# EAGLE board LF_HF_ant (EAGLE 6.5.0)
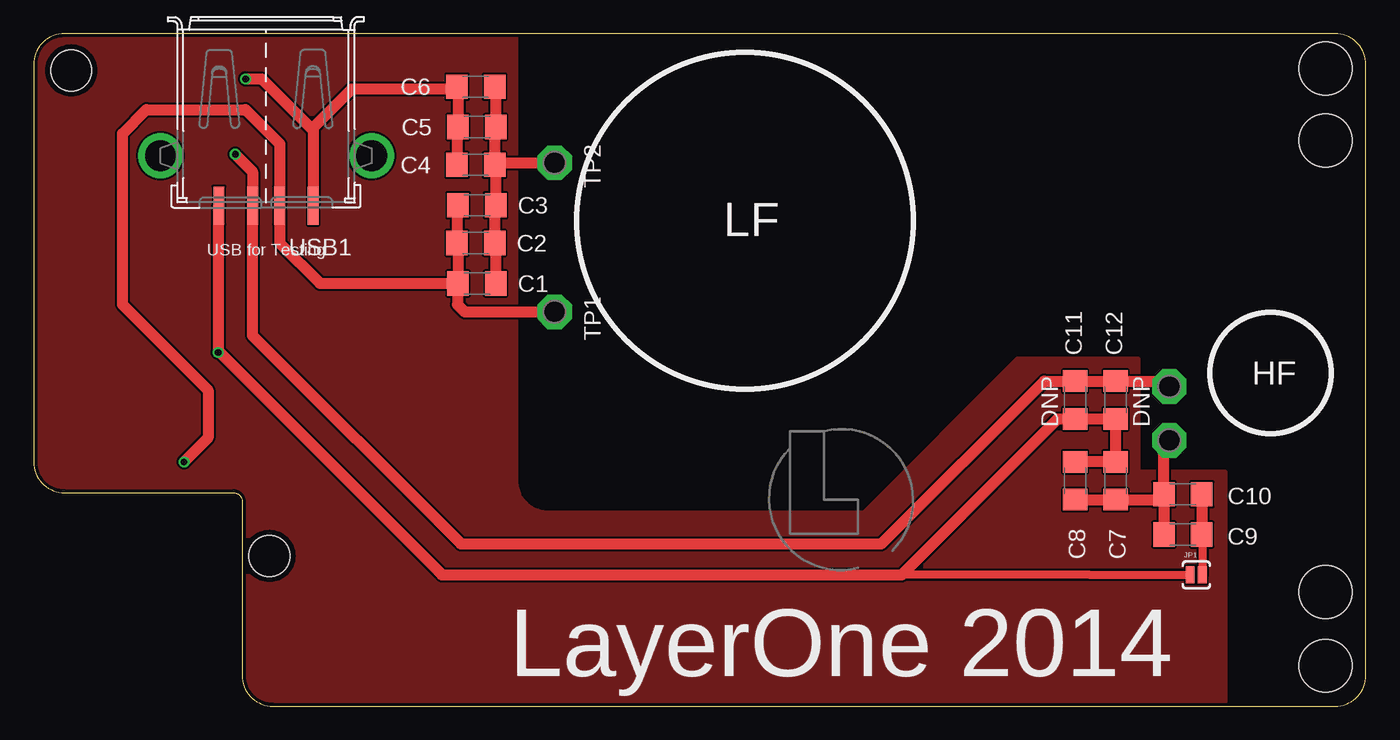
[diagram p0: board, top side]
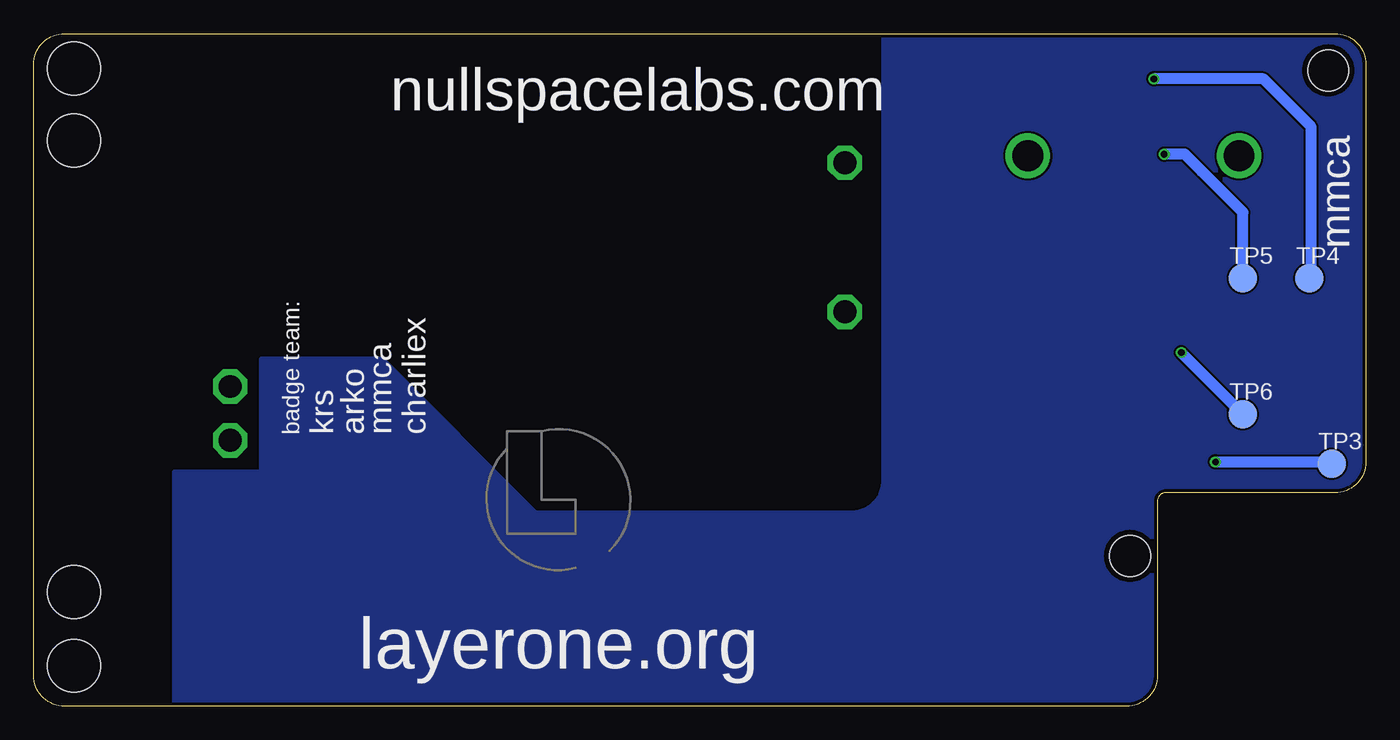
[diagram p1: board, bottom side, seen from below]

Size 99 x 49.96 mm. Coordinates in mm from the lower left corner, seen from the top.
Outline: 2.29,15.86 14.86,15.86 arc-90 15.49,15.22 15.49,2.29 arc90 17.78,0 96.71,0 arc90 99,2.29 99,47.67 arc90 96.71,49.96 2.29,49.96 arc90 0,47.67 0,18.15 arc90 2.29,15.86
Copper layers (1*16): Top 0.035mm / dielectric 1.5mm / Bottom 0.035mm
Design rules "ITEADstudio_DRC": minimum track width 6mil, minimum drill 12mil, track to track 6mil, track to pad 6mil, pad to pad 6mil, via to via 6mil, smd to smd 0mil, copper to edge 10mil, drill to drill 10mil, minimum pad ring 10mil, minimum via ring 6mil, stop-mask expansion 2mil, vias tented up to drill 100mil, thermal gap 10mil
Holes 3.94 mm at 96,47.37 96,3 96,42.02 96,8.49

## Footprints (pad centres in the part's own frame; a part is rotated, then mirrored left to right if it is on the bottom)
1206 = smd 1.6 x 1.8: 1 -1.4,0; 2 1.4,0
C1206 = smd 1.6 x 1.8: 1 -1.4,0; 2 1.4,0
SJ_2S-NO = smd 0.635 x 1.27: 1 -0.45,0; 2 0.45,0
P1-17 = drill 1.702 pad 2.54 octagon: TP 0,0
TP_MILLMAX_R = smd 2.108 x 2.108: TP 0,0
STAND-OFF-TIGHT = hole 3.048: 0,0
CONN_USB_A_F = smd 0.8 x 2.82: 1 -3.5,6.46; 2 -1,6.46; 3 1,6.46; 4 3.5,6.46 | drill 2.3: B1 -7.85,2.75; B2 7.85,2.75

## Placement (x,y rotation side)
C1  [1206]  32.94,31.4 0 top
C2  [1206]  32.86,34.4 0 top
C3  [1206]  32.94,37.21 0 top
C4  [1206]  32.86,40.21 0 top
C5  [1206]  32.94,43.02 0 top
C6  [1206]  32.86,46.02 0 top
C7  [C1206]  80.4,16.75 270 top
C8  [C1206]  77.4,16.75 270 top
C9  [C1206]  85.4,12.75 180 top
C10  [C1206]  85.4,15.75 180 top
C11  DNP  [C1206]  77.4,22.75 270 top
C12  DNP  [C1206]  80.4,22.75 270 top
JP1  [SJ_2S-NO]  86.4,9.75 0 top
TP1  PTR1PAD1-17  [P1-17]  38.72,29.29 270 top
TP2  PTR1PAD1-17  [P1-17]  38.72,40.37 270 top
TP3  TP  [TP_MILLMAX_R]  2.54,18.02 0 bottom
TP4  TP  [TP_MILLMAX_R]  4.19,31.8 0 bottom
TP5  TP  [TP_MILLMAX_R]  9.14,31.8 0 bottom
TP6  TP  [TP_MILLMAX_R]  9.14,21.7 0 bottom
TP7  PTR1PAD1-17  [P1-17]  84.4,23.75 0 top
TP8  PTR1PAD1-17  [P1-17]  84.4,19.75 0 top
U$1  [STM32-PROX_L1LOGO]  60,15.35 0 top
U$2  [STM32-PROX_L1LOGO]  60,15.35 0 bottom
U$3  [STAND-OFF-TIGHT]  2.79,47.23 0 top
U$4  [STAND-OFF-TIGHT]  17.53,11.16 0 top
USB1  CON-USB-F-2PB  [CONN_USB_A_F]  17.27,43.64 180 top

## Library data of the parts
C1-C6 JP1 = SparkFun-Passives
C7-C12 = rcl
TP1-TP8 = testpad
U$1 U$2 = lf-antenna-usb
U$3 U$4 = STM32-PROX
USB1 = dp_devices

## Nets
HF1: C11.1 C12.1 TP5.TP TP7.TP USB1.3
HF2: C7.2 C8.2 C9.2 C10.2 TP8.TP
LO1: C1.1 C2.1 C3.1 TP1.TP TP3.TP USB1.2
LO2: C4.1 C5.1 C6.1 TP4.TP USB1.1
N$3: C1.2 C2.2 C3.2 C4.2 C5.2 C6.2 TP2.TP
N$4: C7.1 C8.1 C11.2 C12.2 JP1.1 TP6.TP USB1.4
N$5: C9.1 C10.1 JP1.2

## Tracks (layer width: path | path; a pad name or v marks a point on that pad's centre or on a via)
GND
  pour Top: 15.75,15.86 2.56,15.75 arc-90 0.25,18.04 0.25,47.36 arc-90 2.54,49.64 35.81,49.64 35.81,16.61 arc90 38.34,14.34 61.72,14.34 73.15,25.77 82.04,25.77 82.04,17.38 88.52,17.38 88.52,0.37 17.92,0.37 arc-90 15.64,1.9
  pour Bottom: 15.75,15.86 2.56,15.75 arc-90 0.25,18.04 0.25,47.36 arc-90 2.54,49.64 35.81,49.64 35.81,16.61 arc90 38.34,14.34 61.72,14.34 73.15,25.77 82.04,25.77 82.04,17.38 88.52,17.38 88.52,0.37 17.92,0.37 arc-90 15.64,1.9
HF1  (via drill 0.5)
  Top 0.813: C11.1 C12.1 84,24.15 TP7.TP | 77.31,24.24 C11.1 | v14.99,41.01 16.27,39.72 USB1.3 16.26,37.17 16.26,27.54 31.75,12.05 62.99,12.05 75.09,24.15 C11.1
  Bottom 0.813: TP5.TP 9.14,36.69 12.19,39.74 13.46,41.01 v14.99,41.01
HF2
  Top 0.406: 83.6,15.35 C10.2
  Top 0.813: C8.2 C7.2 83.6,15.35 C10.2 | C10.2 C9.2 | C10.2 84,19.35 TP8.TP
LO1  (via drill 0.5)
  Top 0.813: C1.1 31.54,34.32 C2.1 31.46,37.13 C3.1 | USB1.2 18.29,37.17 18.29,36.69 | 18.29,36.69 18.29,34.4 21.29,31.4 C1.1 | 18.29,36.69 18.29,41.77 15.75,44.31 8.38,44.31 6.6,42.53 6.6,29.83 8.13,28.31 12.95,23.48 12.95,19.92 v11.18,18.15 | C1.1 31.5,31.36 31.5,29.83 32.03,29.29 TP1.TP
  Bottom 0.813: v11.18,18.15 2.67,18.15 TP3.TP
LO2  (via drill 0.5)
  Top 0.813: C4.1 31.46,42.94 C5.1 31.54,45.94 C6.1 31.27,45.83 23.62,45.83 20.77,42.98 20.77,42.78 | 20.77,42.78 USB1.1 | v15.75,46.59 16.96,46.59 20.77,42.78
  Bottom 0.813: TP4.TP 4.06,31.93 4.06,43.04 7.62,46.59 v15.75,46.59
N$3
  Top 0.406: C1.2 34.34,30.75
  Top 0.813: C4.2 34.42,40.37 TP2.TP | C1.2 34.34,34.32 C2.2 34.26,37.13 C3.2 34.34,40.13 C4.2 | C6.2 34.34,45.94 C5.2 34.26,42.94 C4.2
N$4  (via drill 0.5)
  Top 0.61: 85.93,9.76 JP1.1 78.5,9.75 64.28,9.75
  Top 0.711: 64.28,9.75 arc-90 64.26,9.76
  Top 0.813: C11.2 C12.2 C7.1 C8.1 | 77.3,21.45 C11.2 | USB1.4 13.72,37.13 v13.72,26.27 13.77,26.33 30.34,9.76 64.26,9.76 64.52,9.76 76.1,21.35 C11.2
  Bottom 0.813: TP6.TP v13.72,26.27
N$5
  Top 0.406: JP1.2 86.87,9.75 | 86.87,12.05 86.8,12.05 C9.1
  Top 0.61: 86.87,9.75 86.87,12.05
  Top 0.813: C10.1 C9.1

## Text on the board
tPlace: LF | USB for Testing | HF | LayerOne 2014
bPlace: nullspacelabs.com | mmca | charliex | mmca | arko | krs | badge team: | layerone.org